# Altium PCB l2.pcbdoc
Units mil, origin at the board's own origin, x right, y up, seen from the top; angles counter-clockwise.
Board outline 6445 x 4775 mil, 2 copper layers (Top Layer, Bottom Layer); 16 components, 26 nets, 121 pads, 30 vias.
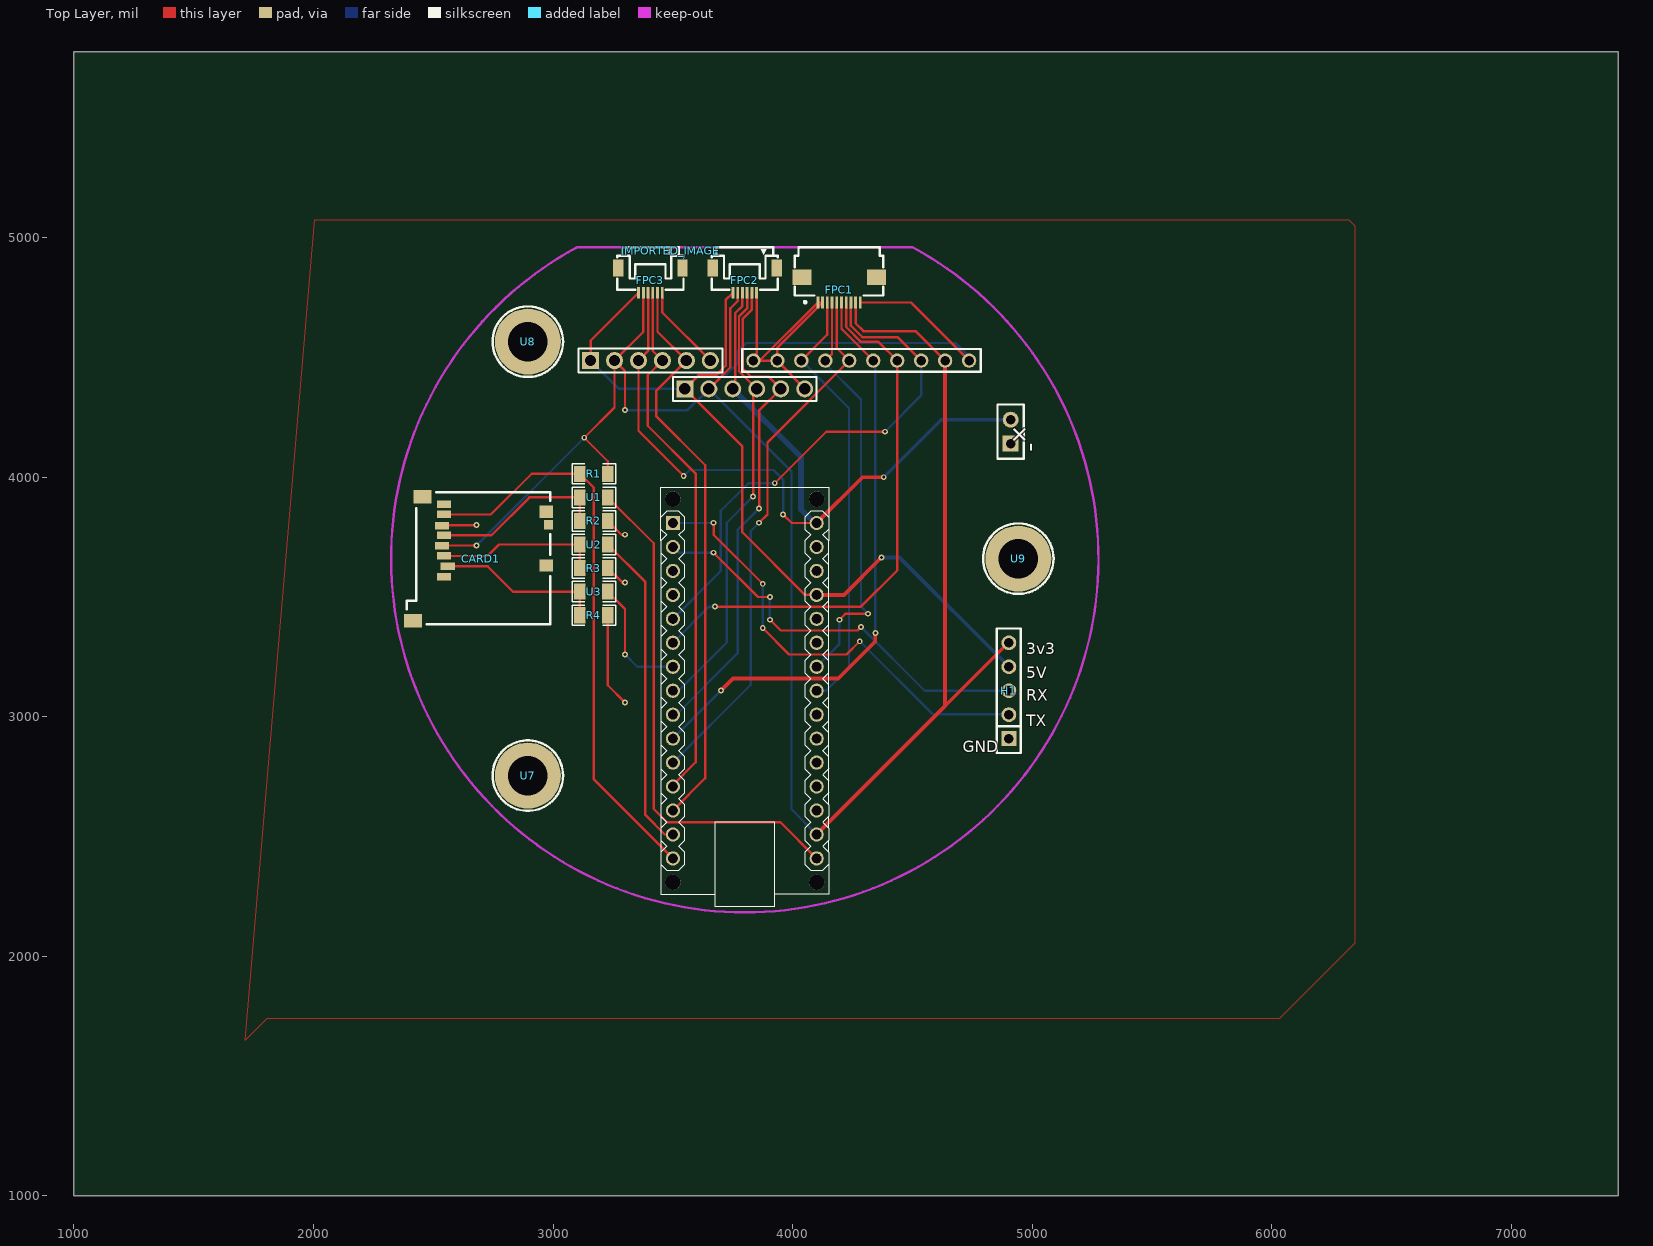
[diagram p0: Top Layer view]
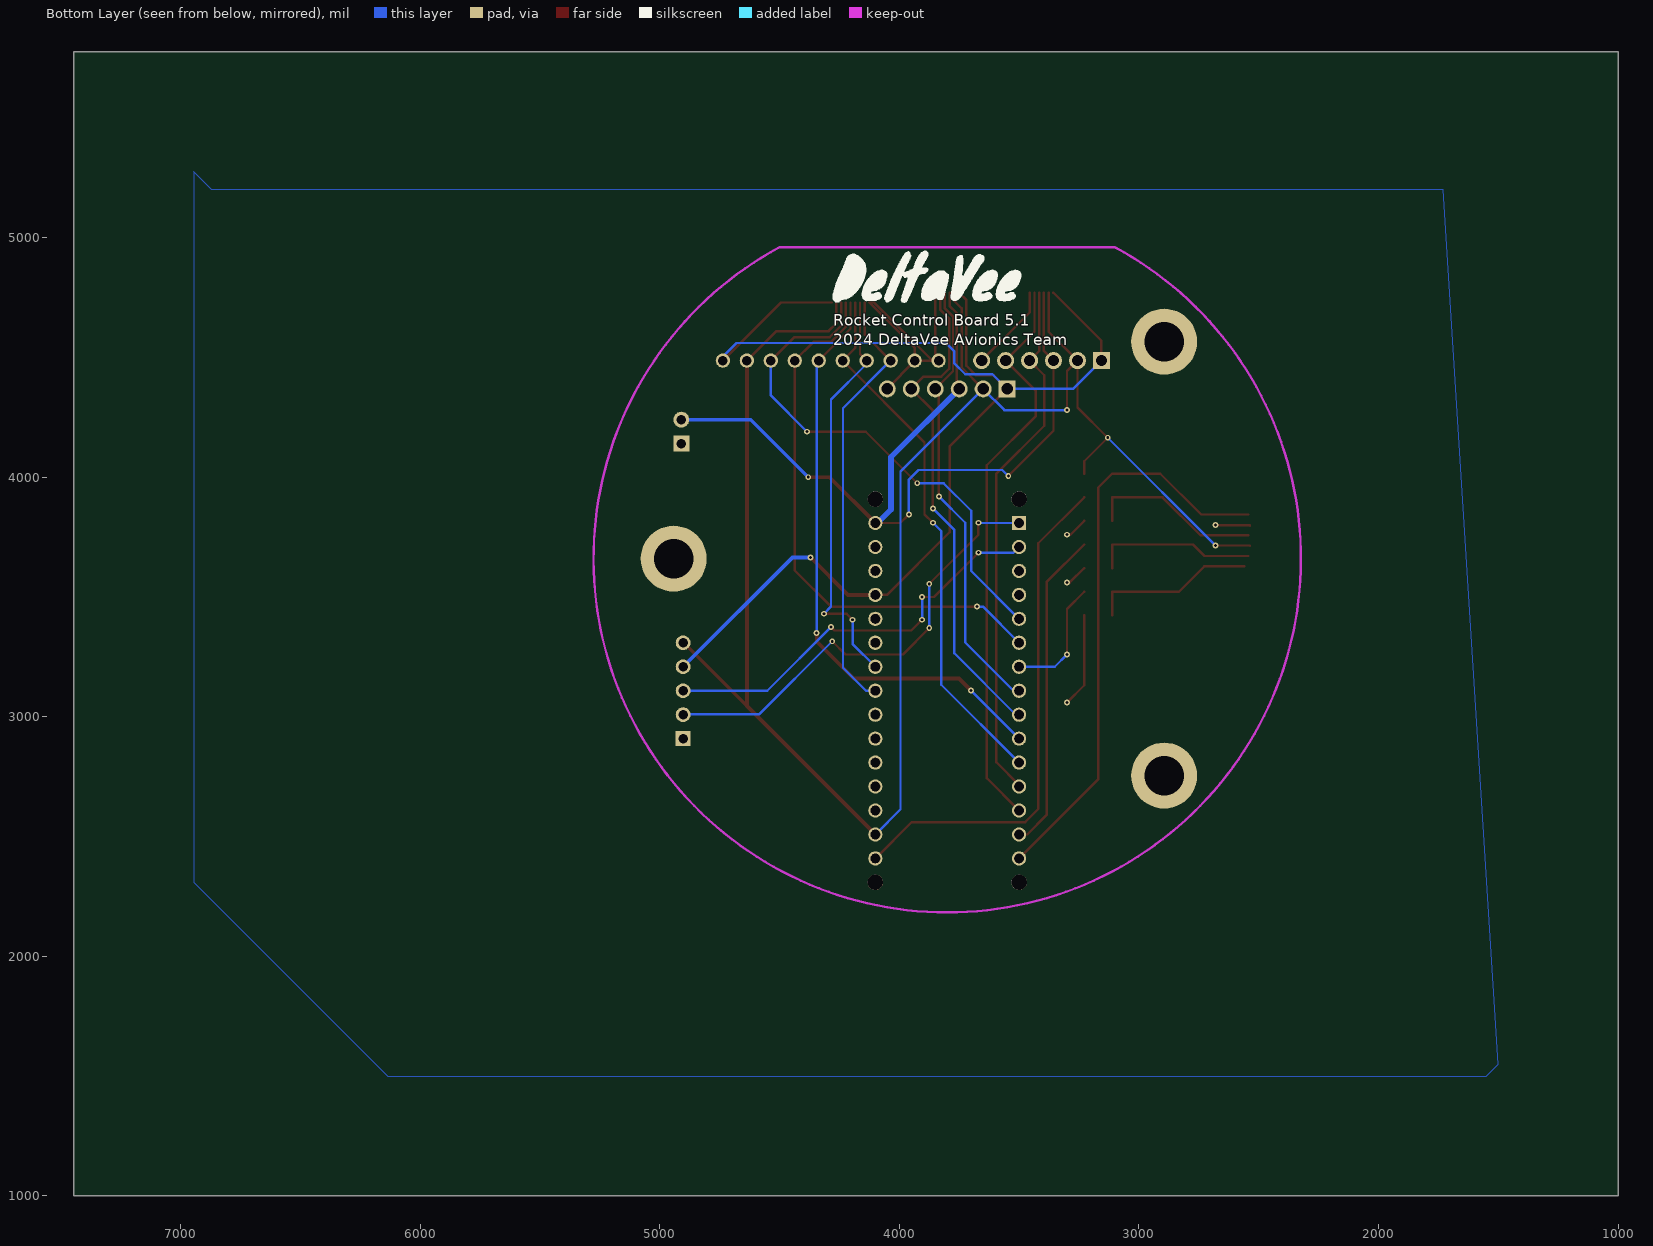
[diagram p1: Bottom Layer view, seen from below]

## Layer stack, top to bottom
Top Layer: signal copper (thickness not stored)
Dielectric: dielectric 12.6, FR-4, Dk 4.8
Bottom Layer: signal copper (thickness not stored)

## Board outline
7445,1000 1000,1000 1000,5775 7445,5775

## Components (designator, comment, footprint, x,y, rotation, side; value= is the part's Value field where it differs from the comment)
CARD1 "473521001" SD-SMD_SD-47352-101 2697.64,3660 r90 top
FPC1 "AFC01-S10FCA-00" FPC-SMD_P0.5-10P_FGS-XJ-H2.0 4193.7,4782.05 r0 top
FPC2 "FFC05020-06SBB123W5M-C" FFC-SMD_6P-P0.50_FFC05020-06SBB123W5M 3800,4821.41 r180 top
FPC3 "FFC05020-06SBB123W5M-C" FFC-SMD_6P-P0.50_FFC05020-06SBB123W5M 3406.3,4821.41 r180 top
H1 "Header-Female-2.54_1x5" HDR-TH_5P-P2.54-V-F 4902.36,3108.82 r90 top
IMPORTED_IMAGE "IMPORTED_IMAGE" IMPORTED_IMAGE 3491.23,4945.29 r0 top
R1 "10kΩ" R1206 3170.08,4014.33 r0 top
R2 "2kΩ" R1206 3170.08,3817.48 r0 top
R3 "2kΩ" R1206 3170.08,3620.63 r0 top
R4 "2kΩ" R1206 3170.08,3423.78 r0 top
U1 "1kΩ" R1206 3170.08,3915.91 r0 top
U2 "1kΩ" R1206 3170.08,3719.05 r0 top
U3 "1kΩ" R1206 3170.08,3522.2 r0 top
U7 "MH_M4_S" MH_M4_PCB 2894.49,2754.49 r0 top
U8 "MH_M4_S" MH_M4_PCB 2894.49,4565.51 r0 top
U9 "MH_M4_S" MH_M4_PCB 4941.73,3660 r0 top

## Footprints (in the part's own frame and the unit in brackets; to place one, negate y for a bottom-side part, rotate by r counter-clockwise, add the part's x,y. Pads: shape width x height; smd on the part's side, far side on the other; paste and mask are expansions set on the pad)
FFC-SMD_6P-P0.50_FFC05020-06SBB123W5M [mm]
  rect 0.3x1.2 smd paste+0 mask+0.051: 1(-1.25,1.3) 2(-0.75,1.3) 3(-0.25,1.3) 4(0.25,1.3) 5(0.75,1.3) 6(1.25,1.3)
  rect 1.1x1.8 smd paste+0 mask+0.051: 7(3.4,-1.3) 8(-3.4,-1.3)
  silkscreen extent -3.5,-3.5 3.5,1
FPC-SMD_P0.5-10P_FGS-XJ-H2.0 [mm]
  rect 0.3x1.3 smd paste+0 mask+0.051: 1(-2.25,-1.338) 2(-1.75,-1.338) 3(-1.25,-1.34) 4(-0.75,-1.338) 5(-0.25,-1.34) 6(0.25,-1.338) 7(0.75,-1.338) 8(1.25,-1.338) 9(1.75,-1.338) 10(2.25,-1.34)
  rect 2x1.6 smd paste+0 mask+0.051: 11(3.95,1.34) 12(-3.95,1.34)
  silkscreen extent -4.7,-1.4 4.7,4.5
HDR-TH_5P-P2.54-V-F [mil]
  rect 62x62 hole 40.16 paste+0 mask+2: 1(-200,0)
  round 62 hole 40.16 paste+0 mask+2: 2(-100,0) 3(0,0) 4(100,0) 5(200,0)
  silkscreen extent -260,-50 260,50
IMPORTED_IMAGE [mil]
MH_M4_PCB [mm]
  round 7 hole 4.2 paste+0 mask+0.051: 1(0,0)
  silkscreen extent -3.74,-3.73 3.74,3.73
R1206 [mil]
  rect 47.54x66.97 smd paste-3937.01 mask+2: 1(-58.22,0) 2(58.22,0)
  silkscreen extent -91,-42 91,42
SD-SMD_SD-47352-101 [mil]
  rect 31.5x59.1 smd paste+0 mask+2: 1(-75.35,153.5) 2(-32.05,137.7) 3(11.25,153.5) 4(54.55,161.3) 5(97.85,153.5) 6(137.8,161.42) 7(184.45,153.5)
  rect 31.5x59.05 smd paste+0 mask+2: 8(227.75,153.45)
  rect 39.37x37.4 smd paste+0 mask+2: 9(141.2,-282.95)
  rect 55.1x74.8 smd paste+0 mask+2: EH(-258.85,282.95) EH(258.85,243.65)
  rect 51.18x55.12 smd paste+0 mask+2: EH(-28.5,-274.1) EH(195.9,-274.1)
  silkscreen extent -275,-290 277,309

## Free pads (board coordinates)
  rect 70.87x70.87 hole 47.24 paste+0 mask+2: 1(3156.3,4486.77) 1(3550,4368.66)
  round 60 hole 39.37 paste+0 mask+4: 1(3836.22,4486.77) 2(3936.22,4486.77) 3(4036.22,4486.77) 4(4136.22,4486.77) 5(4236.22,4486.77) 6(4336.22,4486.77) 7(4436.22,4486.77) 8(4536.22,4486.77) 9(4636.22,4486.77) 10(4736.22,4486.77)
  rect 66.93x66.93 hole 39.37 paste+0 mask+2: 1(4910,4140)
  round 70.87 hole 47.24 paste+0 mask+2: 2(3256.3,4486.77) 2(3650,4368.66) 3(3356.3,4486.77) 3(3750,4368.66) 4(3456.3,4486.77) 4(3850,4368.66) 5(3556.3,4486.77) 5(3950,4368.66) 6(3656.3,4486.77) 6(4050,4368.66)
  round 66.93 hole 39.37 paste+0 mask+2: 2(4910,4240)
  rect 59.37x59.37 hole 39.36 paste+0 mask+2: J1.1(3500,3808.82)
  round 59.37 hole 39.36 paste+0 mask+2: J1.2(3500,3708.82) J1.3(3500,3608.82) J1.4(3500,3508.82) J1.5(3500,3408.82) J1.6(3500,3308.82) J1.7(3500,3208.82) J1.8(3500,3108.82) J1.9(3500,3008.82) J1.10(3500,2908.82) J1.11(3500,2808.82) J1.12(3500,2708.82) J1.13(3500,2608.82) J1.14(3500,2508.82) J1.15(3500,2408.82) J2.1(4100,3808.82) J2.2(4100,3708.82) J2.3(4100,3608.82) J2.4(4100,3508.82) J2.5(4100,3408.82) J2.6(4100,3308.82) J2.7(4100,3208.82) J2.8(4100,3108.82) J2.9(4100,3008.82) J2.10(4100,2908.82) J2.11(4100,2808.82) J2.12(4100,2708.82) J2.13(4100,2608.82) J2.14(4100,2508.82) J2.15(4100,2408.82)
  round 65 hole 65 unplated paste+0: ""(3500,2308.82) ""(3500,3908.82) ""(4100,2308.82) ""(4100,3908.82)

## Via types
v1: diameter 24.41, hole 12.2, Top Layer to Bottom Layer, tented both sides, 30 vias

## Nets (pads, with @x,y where several pads share a name; then routed paths per layer and width w, separated by ;. In a path a pad name is that pad's centre, name@x,y a point inside that pad or via, vN(x,y) a via of type N, cw(c..) or ccw(c..) an arc to the next point about the centre after c; other vN are vias at no path point)
3.3V: CARD1.4 FPC1.9 FPC2.5 FPC3.5 H1.5 pad.2@3256.3,4486.77 pad.2@3650,4368.66 pad.9 pad.J2.14 R1.2 | length 8647.1
  Top Layer w10: CARD1.4 v1(2680,3715) ; R1.2 3228.3,4066.7 v1(3130,4165) 3256.3,4291.3 pad.2@3256.3,4486.77 ; v1(3300,4280) 3300,4443.07 pad.2@3256.3,4486.77 ; FPC3.5 3376.77,4607.24 pad.2@3256.3,4486.77 ; pad.2@3650,4368.66 3740,4458.66 3740,4705 3770.47,4735.47 FPC2.5 ; FPC1.9 4262.6,4642.4 4295,4610 4512.99,4610 pad.9
  Top Layer w15.75: pad.9 4636.22,3045.04 pad.J2.14 4900,3308.82 H1.5
  Bottom Layer w10: v1(2680,3715) v1(3130,4165) ; v1(3300,4280) 3561.34,4280 pad.2@3650,4368.66 ; pad.2@3650,4368.7 3995,4023.7 3995,2613.8 pad.J2.14
5V: FPC1.10 FPC2.6 FPC3.6 H1.4 pad.1@3156.3,4486.77 pad.1@3550,4368.66 pad.10 pad.J2.4 | length 5398.8
  Top Layer w10: pad.1@3156.3,4486.77 3156.3,4569.44 FPC3.6 ; pad.1@3550,4368.66 3606.34,4425 3680,4425 3720,4465 3720,4739.4 FPC2.6 ; pad.1@3550,4368.7 3790,4128.7 3790,3770 4051.2,3508.8 pad.J2.4 ; FPC1.10 4493.7,4729.29 pad.10
  Top Layer w15.75: pad.J2.4 4213.82,3508.82 v1(4370,3665)
  Bottom Layer w10: pad.1@3156.3,4486.77 3274.41,4368.66 pad.1@3550,4368.66 ; pad.1@3550,4368.7 3611.3,4430 3725,4430 3770,4475 3770,4525 3805,4560 4680,4560 4736.2,4503.8 pad.10
  Bottom Layer w15.75: v1(4370,3665) 4446.18,3665 H1.4
D2: FPC1.8 pad.8 pad.J1.5 | length 2165.9
  Top Layer w10: v1(3925,3975) 4140,4190 v1(4385,4190) ; FPC1.8 4242.9,4632.1 4290,4585 4437.99,4585 pad.8
  Bottom Layer w10: pad.J1.5 3700,3608.82 3700,3860 3815,3975 v1(3925,3975) ; v1(4385,4190) 4536.22,4341.22 pad.8
D3: FPC1.7 pad.7 pad.J1.6 | length 2310.6
  Top Layer w10: v1(3675,3460) 4285,3460 4436.22,3611.22 pad.7 4357.99,4565 4285,4565 4223.23,4626.77 FPC1.7
  Bottom Layer w10: pad.J1.6 3651.18,3460 v1(3675,3460)
D5: FPC2.3 pad.4@3850,4368.66 pad.J1.8 | length 1864.9
  Top Layer w10: FPC2.3 3809.84,4704.84 3776.07,4671.07 3776.07,4442.59 3850,4368.66 3835,4353.66 v1(3835,3920)
  Bottom Layer w10: pad.J1.8 3523.82,3108.82 3725,3310 3725,3810 v1(3835,3920)
D6: FPC2.2 pad.5@3950,4368.66 pad.J1.9 | length 2079.9
  Top Layer w10: FPC2.2 3829.53,4699.53 3792.14,4662.14 3792.14,4452.86 3825,4420 3898.66,4420 3950,4368.66 3860,4278.66 v1(3860,3870)
  Bottom Layer w10: pad.J1.9 3513.82,3008.82 3770,3265 3770,3780 v1(3860,3870)
D7: FPC1.6 pad.6@4336.22,4486.77 pad.J1.10 | length 2495.2
  Top Layer w10: FPC1.6 4203.53,4619.45 pad.6@4336.22,4486.77
  Top Layer w15.75: v1(3701.18,3110) 3751.18,3160 4190,3160 4345,3315 v1(4345,3350)
  Bottom Layer w10: pad.J1.10 v1(3701.18,3110) v1@3705,3110 ; pad.6@4336.2,4486.8 4345,4486.8 v1(4345,3350)
D8: FPC1.5 pad.5@4236.22,4486.77 pad.J1.11 | length 2247.1
  Top Layer w10: v1(3860,3810) 3895,3845 3895,4145.5 pad.5@4236.2,4486.8 ; FPC1.5 4183.85,4539.14 pad.5@4236.22,4486.77
  Bottom Layer w10: pad.J1.11 3825,3133.82 3825,3775 v1(3860,3810)
GND: CARD1.6 FPC1.1 FPC1.2 FPC2.1 FPC3.1 H1.1 pad.1@3836.22,4486.77 pad.1@4910,4140 pad.2@3936.22,4486.77 pad.6@3656.3,4486.77 pad.6@4050,4368.66 pad.J1.4 pad.J2.2 R2.2 R3.2 R4.2 U7.1 U8.1 U9.1 | length 2359.7
  Top Layer w10: CARD1.6 2538.42,3800 v1(2680,3800) ; R4.2 3228.3,3131.7 v1(3300,3060) ; R3.2 3288.93,3560 v1(3300,3560) ; R2.2 3285.8,3760 v1(3300,3760) ; FPC3.1 3455.51,4687.56 pad.6@3656.3,4486.77 ; FPC2.1 3849.21,4499.76 pad.1@3836.22,4486.77 ; pad.6@4050,4368.66 pad.2@3936.22,4486.77 ; pad.1@3836.22,4486.77 3862.53,4486.77 FPC1.1 FPC1.2 3936.22,4540.77 pad.2@3936.22,4486.77 ; pad.1@3836.22,4486.77 pad.2@3936.22,4486.77
RESET: pad.J1.3
RX: H1.3 pad.J1.2 | length 1719
  Top Layer w10: v1(3670,3685) 3855,3500 v1(3905,3500) ; v1(3905,3405) 3950,3360 4270,3360 v1(4285,3375)
  Bottom Layer w10: pad.J1.2 3523.82,3685 v1(3670,3685) ; v1(3905,3405) v1(3905,3500) ; v1(4285,3375) 4551.18,3108.82 H1.3
S$2248: 
S$3142: 
SCLPIN: FPC1.4 pad.4@4136.22,4486.77 pad.J2.7 | length 1750.9
  Top Layer w10: pad.4@4136.22,4486.77 4164.16,4514.72 FPC1.4 ; v1(4195,3405) 4220,3430 v1(4315,3430)
  Bottom Layer w10: pad.J2.7 4195,3303.82 v1(4195,3405) ; pad.4@4136.22,4486.77 4136.22,4473.78 4285,4325 4285,3460 v1(4315,3430)
SD_CHIPSELECT: CARD1.2 R4.1 U3.1 | length 694.1
  Top Layer w10: CARD1.2 2727.05,3627.95 2832.8,3522.2 U3.1 R4.1
SD_D4: pad.J1.7 U3.2 | length 513.1
  Top Layer w10: U3.2 3300,3450.51 v1(3300,3260)
  Bottom Layer w10: v1(3300,3260) 3351.18,3208.82 pad.J1.7
SD_D11: pad.J1.14 U2.2 | length 1342.6
  Top Layer w10: U2.2 3385,3562.36 3385,2590 3466.18,2508.82 pad.J1.14
SD_D12: CARD1.7 pad.J1.15 R1.1 | length 2404
  Top Layer w10: CARD1.7@2544.1,3844.5 2739.5,3844.5 2910.7,4014.3 R1.1 ; R1.1 3170,3956.19 3170,2738.82 pad.J1.15
SD_D13: pad.J2.15 U1.2 | length 2145.7
  Top Layer w10: U1.2 3420,3724.2 3420,2615 3475,2560 3948.82,2560 pad.J2.15
SD_MOSI: CARD1.3 R3.1 U2.1 | length 686.1
  Top Layer w10: CARD1.3 2726.3,3671.2 2774.1,3719.1 U2.1 ; R3.1 U2.1
SD_SCK: CARD1.5 R2.1 U1.1 | length 731.6
  Top Layer w10: CARD1.5 2742.85,3757.85 2900.91,3915.91 U1.1 R2.1
SDAPIN: FPC1.3 pad.3@4036.22,4486.77 pad.J2.8 | length 1826.4
  Top Layer w10: pad.3@4036.22,4486.77 4144.48,4595.03 FPC1.3
  Bottom Layer w10: pad.3@4036.2,4486.8 4235,4288 4235,3205 4138.8,3108.8 pad.J2.8
SRX: FPC3.3 pad.4@3456.3,4486.77 pad.J1.12 | length 2225.7
  Top Layer w10: FPC3.3 3416.14,4526.93 pad.4@3456.3,4486.77 ; pad.4@3456.3,4486.8 3395,4425.5 3395,4215 3595,4015 3595,2810 3500,2715 pad.J1.12
STX: FPC3.2 pad.5@3556.3,4486.77 pad.J1.13 | length 2404.5
  Top Layer w10: FPC3.2 3435.83,4607.24 3556.3,4486.77 3430,4360.47 3430,4255 3635,4050 3635,2743.82 pad.J1.13
TX: H1.2 pad.J1.1 | length 1917.9
  Top Layer w10: v1(3670,3810) 3670,3760 v1(3875,3555) ; v1(3875,3370) 3985,3260 4225,3260 v1(4280,3315)
  Bottom Layer w10: pad.J1.1 3668.82,3808.82 v1(3670,3810) ; v1(3875,3370) v1(3875,3555) ; v1(4280,3315) 4585,3010 4901.18,3010 H1.2
VIN: FPC2.4 FPC3.4 pad.2@4910,4240 pad.3@3356.3,4486.77 pad.3@3750,4368.66 pad.J2.1 | length 3718.8
  Top Layer w10: pad.3@3356.3,4486.77 3396.46,4526.93 FPC3.4 ; pad.3@3356.3,4486.8 3356.3,4193.7 v1(3545,4005) ; pad.3@3750,4368.66 3760,4378.66 3760,4685 3790.16,4715.16 FPC2.4 ; v1(3960,3845) 3996.18,3808.82 pad.J2.1
  Top Layer w15.75: pad.J2.1 4291.18,4000 v1(4380,4000)
  Bottom Layer w10: v1(3545,4005) 3570,4030 3920,4030 3960,3990 v1(3960,3845)
  Bottom Layer w15.75: v1(4380,4000) 4620,4240 pad.2@4910,4240
  Bottom Layer w23.62: pad.3@3750,4368.7 4035,4083.7 4035,3865 4091.2,3808.8 pad.J2.1
pads on no net: CARD1.1 CARD1.8 CARD1.9 CARD1.EH FPC1.11 FPC1.12 FPC2.7 FPC2.8 FPC3.7 FPC3.8
copper on no net: | length 0.1

## Polygon pours and split planes (outlines as drawn)
GND on Mid-Layer 2 (solid): 2025,5110 5970,5110 5985,5125 5985,2300 5635,1950 2150,1950 2110,1910
GND on Mid-Layer 1 (solid): 2175,5140 5840,5140 5865,5165 5865,2100 5575,1810 1990,1810 1815,1985
GND on Top Layer (solid): 2005,5075 6320,5075 6345,5050 6345,2055 6030,1740 1805,1740 1715,1650
GND on Bottom Layer (solid): 1730,5200 6870,5200 6945,5275 6945,2310 6135,1500 1550,1500 1500,1550

## Keep-outs
Keep-Out Layer:
  lines w10 net S$2248: 3100.05,4959.9 ccw(c3800,3660) 4499.95,4959.91

## Silkscreen, mask and mechanical layers (free items; w line width, h text height)
Top Overlay:
  drawing of 222 lines, arcs and shapes, not listed
  text "+" at 4956.72,4233.28 h80 r225
  text "-" at 5025,4105 h80 r90
  text "3v3" at 4975,3261.38 h47.24
  text "5V" at 4975,3161.38 h47.24
  text "RX" at 4975,3066.38 h47.24
  text "TX" at 4975,2961.38 h47.24
  text "GND" at 4710,2851.38 h47.24
Bottom Overlay:
  text "Rocket Control Board 5.1" at 4275,4631.38 h47.24
  text "2024 DeltaVee Avionics Team" at 4275,4551.38 h47.24